# Altium PCB SquarePS.PcbDoc
Units mil, origin at the board's own origin, x right, y up, seen from the top; angles counter-clockwise.
Board outline 24000 x 20000 mil, 2 copper layers (Top Layer, Bottom Layer); 29 components, 11 nets, 87 pads, 67 vias.
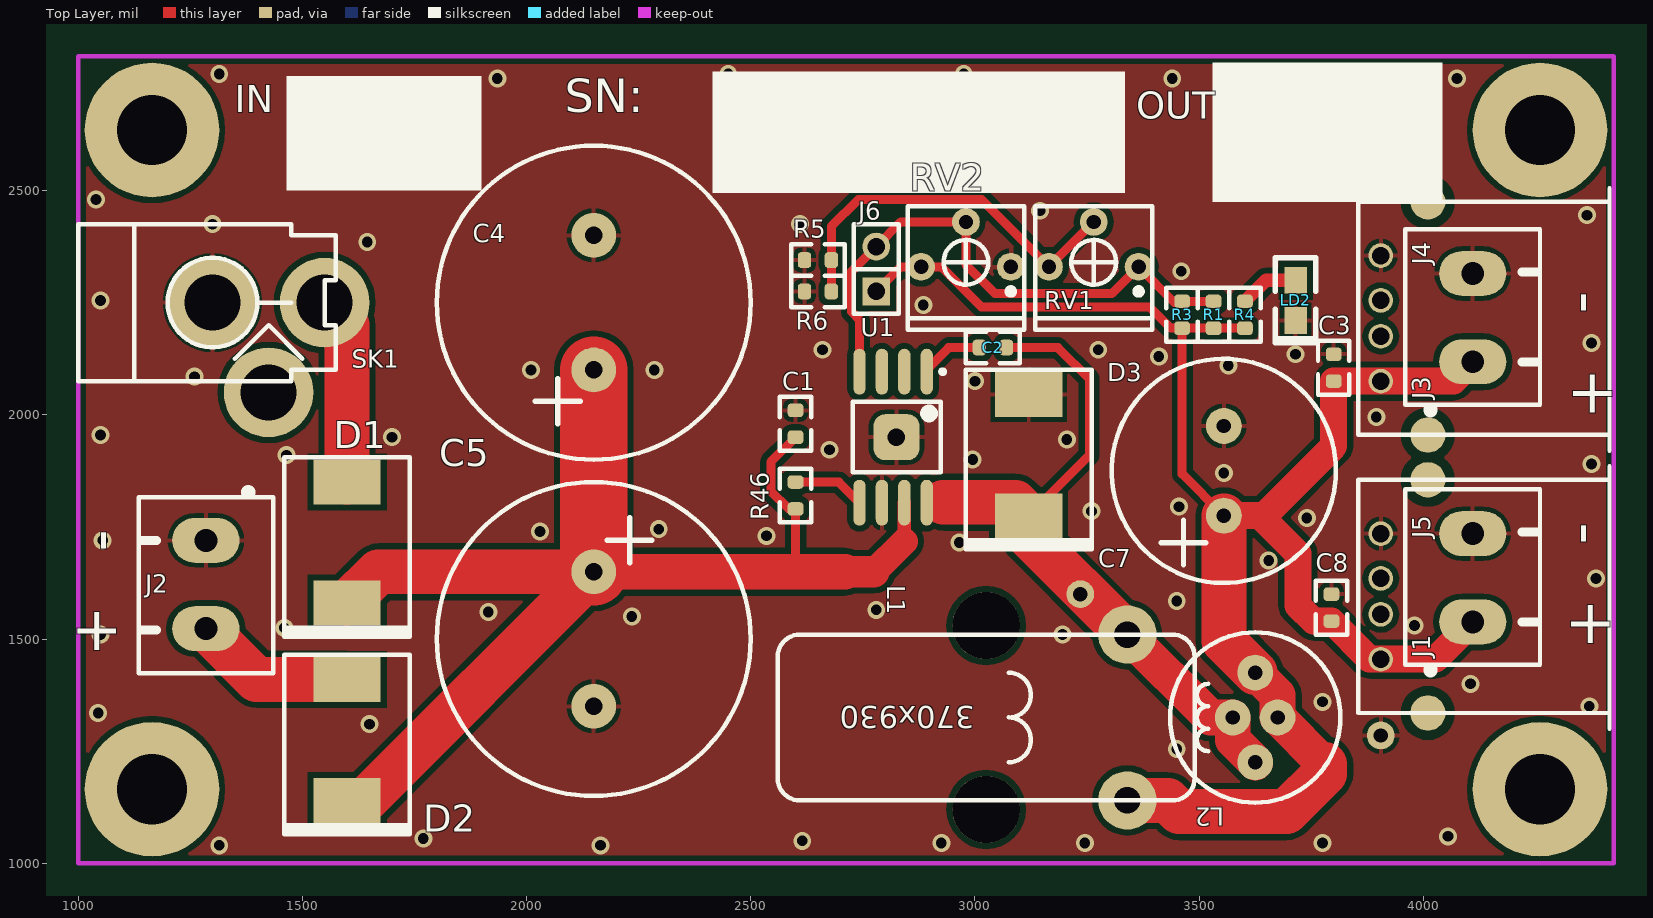
[diagram p0: Top Layer view]
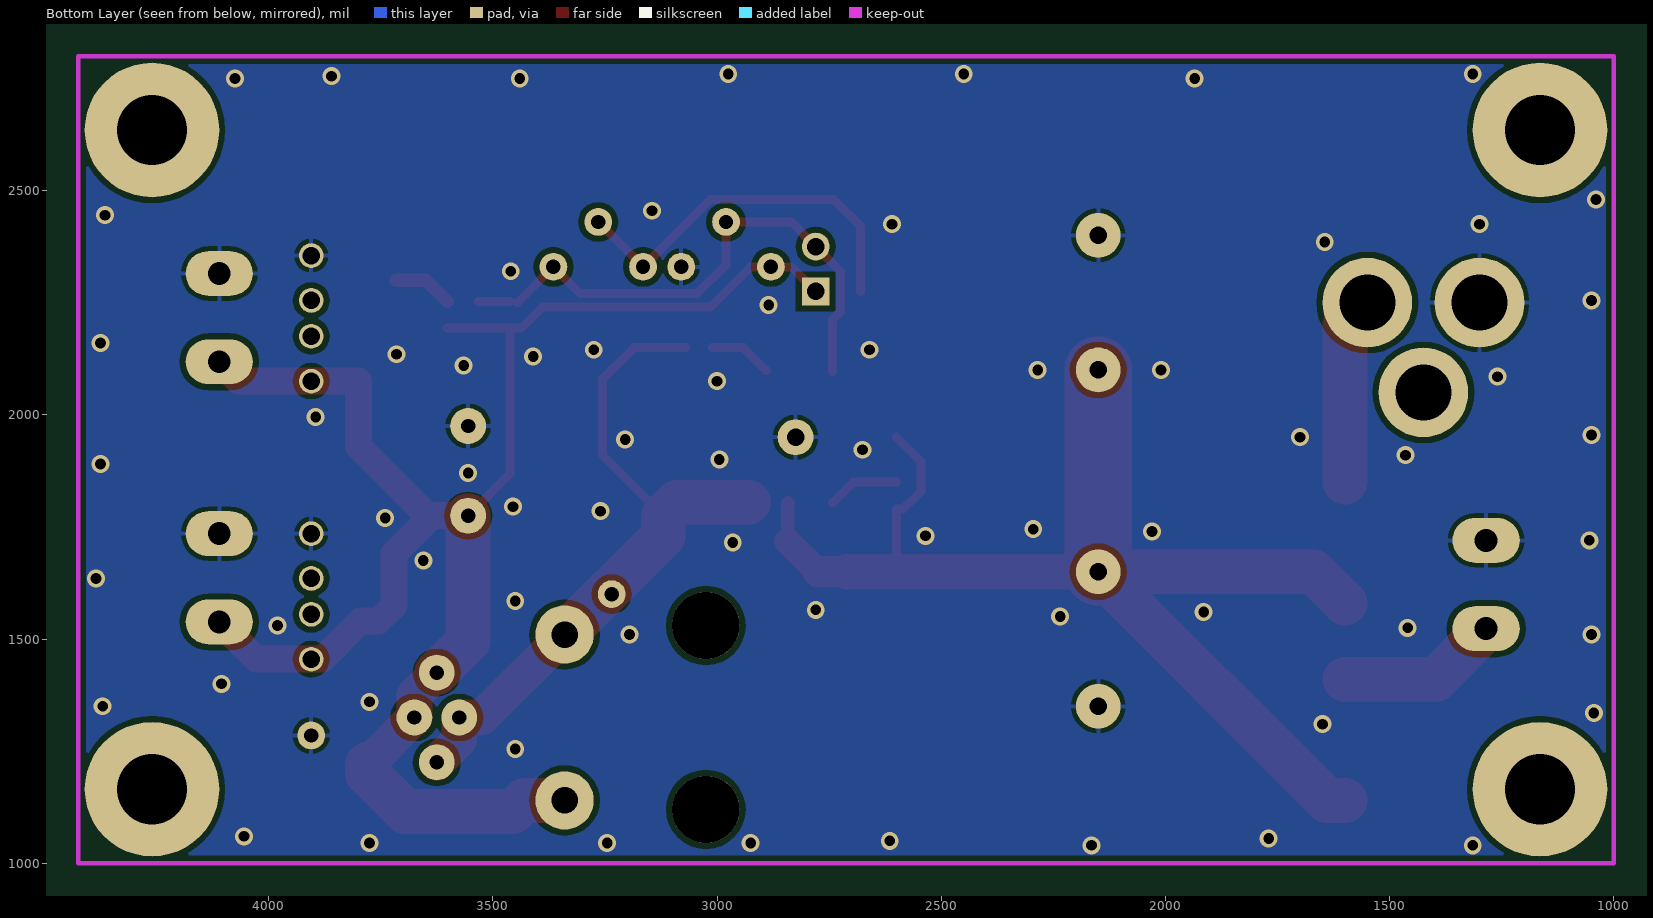
[diagram p1: Bottom Layer view, seen from below]

## Layer stack, top to bottom
Top Layer: signal copper 1.4
Dielectric: dielectric 12.6, FR-4, Dk 4.8
Bottom Layer: signal copper 1.4

## Board outline
0,0 24000,0 24000,20000 0,20000

## Design rules (kind name [scope] priority, off if disabled: settings)
Clearance Clearance_poly [InPoly] p1: gap=13
Clearance [All] p2: gap=7
ComponentClearance [All] p1 off: gap=10 collisioncheckmode=3 verticalgap=10 showdistances=FALSE
FabricationTestPointUsage TestPointUsage [All] p1: valid=0 allowmultiple=FALSE
FabricationTestpoint Testpoint [All] p1: side=3 testpointundercomponent=TRUE minsize=40 maxsize=100 preferedsize=60 minholesize=0 maxholesize=40 preferedholesize=32 testpointgrid=1 allowsidetop=TRUE allowsidebottom=TRUE usegrid=TRUE gridtolerance=0.01
HoleSize [All] p1: absolutevalues=TRUE maxlimit=150 minlimit=24 maxpercent=80.000 minpercent=20.000
MinimumAnnularRing [All] p1: minimumring=8
PlaneClearance [All] p1: clearance=12
PolygonConnect PolygonConnect_via [IsVia] p1: connectstyle=Direct reliefconductorwidth=10 reliefentries=4 polygonreliefangle="90 Angle" airgapwidth=10
PolygonConnect [All] p2: connectstyle=Relief reliefconductorwidth=10 reliefentries=4 polygonreliefangle="90 Angle" airgapwidth=10
RoutingVias [All] p1: holewidth=24 width=40 viastyle="Through Hole" minholewidth=24 minwidth=35 maxholewidth=28 maxwidth=50
SilkscreenOverComponentPads [All vs (IsText AND OnLayer('Top Overlay'))] p1: minsilkscreentomaskgap=10
SolderMaskExpansion [All] p1: expansion=4
Width [All] p1: maxlimit=150 minlimit=10 preferedwidth=10
22 further rules are at their usual default settings.

## Components (designator, comment, footprint, x,y, rotation, side; value= is the part's Value field where it differs from the comment)
C1 "100n" 0603 2600,2010 r270 top
C2 "10n" 0603 3010,2150 r0 top
C3 "100n" 0603 3800,2075 r90 top
C4 "1000uF 50V" RB.3/.7 2150,2100 r270 top
C5 "1000uF 50V" RB.3/.7 2150,1650 r90 top
C7 "2200u 25V" RB.2/.5 3555,1775 r270 top
C8 "100n" 0603 3795,1540 r90 top
D1 "SK56C" SMC 1600,1715 r90 top
D2 "SK56C" SMC 1600,1275 r90 top
D3 "SK56C" SMC 3120,1910 r90 top
J1 "CON2" Terms5mm2 4110,1538.15 r90 top
J2 "CON2" Terms5mm2 1285,1720 r270 top
J3 "CON2" Terms5mm2 4110,2118.15 r90 top
J4 "USB-A" USB_A 3905,2175 r90 top
J5 "USB-A" USB_A 3905,1555 r90 top
J6 "PINS2" SIP2 2780,2275 r90 top
L1 "47uH 5A" Inductor370x930 3075,1325 r180 top
L2 "22uH 1A" INDUCTOR6B 3625,1325 r180 top
LD2 "LED-S" 0805Diode 3715,2210 r90 top
R1 "DNF" 0603 3532,2253 r270 top
R3 "DNF" 0603 3462,2253 r270 top
R4 "1k" 0603 3602,2193 r90 top
R5 "DNF" 0603 2620,2345 r0 top
R6 "DNF" 0603 2620,2275 r0 top
R46 "470k" 0603 2600,1850 r270 top
RV1 "DNF" VR3362P 3265,2330 r0 top
RV2 "DNF" VR3362P 2980,2330 r0 top
SK1 "SOCKETDC" SKTPWR 1550,2250 r0 top
U1 "LM22674" PSOP-8 2825,1950 r270 top

## Footprints (in the part's own frame and the unit in brackets; to place one, negate y for a bottom-side part, rotate by r counter-clockwise, add the part's x,y. Pads: shape width x height; smd on the part's side, far side on the other; paste and mask are expansions set on the pad)
0603 [mil]
  rrect50% 30x35 smd: 1(0,0) 2(60,0)
  silkscreen extent -30,-35 90,35
0805Diode [mil]
  rect 60x50 smd: A(90,0) K(0,0)
  silkscreen extent -50,-45 140,45
INDUCTOR6B [mil] "380mil dia"
  round 80 hole 32: 1(0,100) 1(50,0) 2(-50,0) 2(0,-100)
  silkscreen extent -190,-190 190,190
Inductor370x930 [mil]
  round 150 hole 150: 0(50,205) 0(50,-205)
  round 130 hole 59: 1(-265,185) 2(-265,-185)
  silkscreen extent -415,-185 515,185
PSOP-8 [mm]
  oval 2.6x0.7 smd: 1(-3.711,1.717) 2(-3.711,0.447) 3(-3.711,-0.823) 4(-3.711,-2.093) 5(3.711,-2.093) 6(3.711,-0.823) 7(3.711,0.447) 8(3.711,1.717)
  rrect50% 2.6x2.6 smd: 9(0,0)
  silkscreen extent -3.84,-2.47 1.99,2.74
RB.2/.5 [mil]
  round 80 hole 32: 1(0,0) 2(-200,0)
  silkscreen extent -350,-250 150,250
RB.3/.7 [mil]
  round 100 hole 39: 1(0,0) 2(-300,0)
  silkscreen extent -500,-350 200,350
SIP2 [mil]
  rect 62x62 hole 39: 1(0,0)
  round 62 hole 39: 2(100,0)
  silkscreen extent -50,-50 150,50
SKTPWR [mil]
  round 200 hole 125: COM(-250,0) PIN(0,0) SW(-125,-200)
  silkscreen extent -550,-175 25,175
SMC [mil]
  rect 100x150 smd: A(135,0) K(-135,0)
  silkscreen extent -210,-140 190,140
Terms5mm2 [mil]
  oval 100x150 hole 51: 1(0,0) 2(196.85,0)
  silkscreen extent -108,-150 296,150
USB_A [mil]
  round 78.74 smd: 0(-220,-105) 0(300,-105)
  round 55 hole 39: 1(-100,0) 2(0,0) 3(80,0) 4(180,0)
  silkscreen extent -255,-510 330,50
VR3362P [mil]
  round 62 hole 32: CCW(-100,0) CW(100,0) W(0,100)
  silkscreen extent -130,-140 130,135

## Part data
C1 C2 C3 C8: library part CAP
C4 C5 C7: library part "CAPACITOR POL"
D1 D2 D3: library part "DIODE SCHOTTKY"
J6: library part CON2
L1 L2: library part INDUCTOR2
LD2: "LED"
R1 R3 R4 R5 R6 R46: library part RES8
RV1 RV2: library part RES6
SK1: "DC Power Connector"
U1: library part LM22675, "1A SMPS"

## Free pads (board coordinates)
  round 80 hole 39: 0(2825,1950)
  round 62 hole 32: 1(3235,1600) 2(3905,1285)
  round 300 hole 157 paste+0: ""(1165,1165) ""(1165,2635) ""(4260,1165) ""(4260,2635)

## Via types
v1: diameter 40, hole 24, Top Layer to Bottom Layer, tented both sides, 67 vias

## Nets (pads, with @x,y where several pads share a name; then routed paths per layer and width w, separated by ;. In a path a pad name is that pad's centre, name@x,y a point inside that pad or via, vN(x,y) a via of type N, cw(c..) or ccw(c..) an arc to the next point about the centre after c; other vN are vias at no path point)
GND: C1.1 C3.2 C4.2 C5.2 C7.2 C8.2 D3.A J1.2 J2.1 J3.2 J4.4 J5.4 LD2.K pad.0 pad.2 R5.1 R6.1 RV2.CW SK1.COM U1.6 U1.9
  other v1: 1315,1040 2165,1040 2925,1045 3245,1045 3775,1045 2615,1050 1770,1055 4055,1060 3450,1255 1650,1310 1045,1335 4370,1350 3775,1360 4105,1400 1050,1510 3195,1510 1460,1525 3980,1530 2235,1550 1915,1560 2780,1565 3450,1585 4385,1635 3655,1675 2965,1715 1055,1720 2535,1730 2030,1740 2295,1745 3740,1770 3260,1785 3455,1795 3555,1870 4375,1890 2995,1900 1465,1910 2676,1922 3205,1945 1700,1950 1050,1955 3895,1995 3000,2075 1260,2085 2010,2100 2285,2100 3565,2110 3410,2130 3715,2135 2660,2145 3275,2145 4375,2160 2885,2245 1050,2255 3460,2320 1645,2385 1300,2425 2610,2425 4365,2445 3145,2455 1040,2480 1935,2750 3440,2750 4075,2750 3860,2755 1315,2760 2450,2760 2975,2760
NetC1_2: C1.2 C4.1 C5.1 D1.K D2.K R46.2 U1.7 | length 2951.5
  Top Layer w20: 2600,1650 R46.2 2585,1790 2545,1830 2545,1895 C1.2
  Top Layer w30: 2842.59,1717.59 U1.7
  Top Layer w60: 2775,1650 2842.59,1717.59
  Top Layer w70: 2710,1650 2775,1650
  Top Layer w80: C5.1 2600,1650 2710,1650
  Top Layer w100: D2.K 1640,1140 C5.1 1670,1650 D1.K
  Top Layer w150: C5.1 C4.1
NetC2_1: C2.1 U1.1 | length 141.3
  Top Layer w20: U1.1@2890,2098.69 2941.31,2150 C2.1
NetC2_2: C2.2 D3.K L1.2 L2.1 pad.1 U1.8 | length 1565.8
  Top Layer w20: C2.2 3185,2150 3255,2080 3255,1910 D3.K
  Top Layer w80: L1.2 3525,1325 3575,1325 3575,1275 L2.1@3625,1225
  Top Layer w100: 2930,1805 3090,1805 D3.K 3120,1730 L1.2
NetD1_A: D1.A SK1.PIN | length 420.7
  Top Layer w100: SK1.PIN 1600,2200 D1.A
NetD2_A: D2.A J2.2 | length 361.9
  Top Layer w100: J2.2 1398.15,1410 D2.A
NetJ6_2: J6.2 R1.1 R3.1 RV1.CW RV2.W U1.4 | length 1246.7
  Top Layer w20: U1.4 2742.59,2212.41 2725,2230 2725,2320 J6.2 2835,2430 RV2.W 2980,2335 3045,2270 3305,2270 RV1.CW R3.1@3445,2250 ; R3.1 R1.1
NetLD2_A: LD2.A R4.2 | length 132.5
  Top Layer w30: R4.2 3649,2300 LD2.A
NetR5_2: R5.2 R6.2 RV1.CCW RV1.W | length 858.4
  Top Layer w20: R6.2 R5.2 2680,2420 2740,2480 3015,2480 RV1.CCW RV1.W
NetR46_1: R46.1 U1.5 | length 161.7
  Top Layer w20: R46.1 2696.48,1850 U1.5
VCC: C3.1 C7.1 C8.1 J1.1 J3.1 J4.1 J5.1 J6.1 L1.1 L2.2 R1.2 R3.2 R4.1 RV2.CCW | length 4073
  Top Layer w20: J6.1 2835,2330 RV2.CCW 2925,2330 3015,2240 3390,2240 3437,2193 R3.2 ; C7.1 3462,1868 R3.2 ; R4.1 R1.2 ; R3.2 R1.2 ; R3.2 R1.2
  Top Layer w60: C7.1 3635.61,1775 ; J1.1 4026.85,1455 J5.1 3880,1455 C8.1 3755,1540 3720,1575 3720,1690.61 3635.61,1775 ; J3.1 4066.85,2075 J4.1 C3.1 3800,1930 3645,1775 3635.61,1775
  Top Layer w80: L2.2@3625,1425 3675,1375 3675,1325 3780,1220
  Top Layer w100: L1.1 3430,1140 3455,1115 3695,1115 3780,1200 3780,1220 ; C7.1 3555,1495 L2.2@3625,1425
pads on no net: J4.0 J4.2 J4.3 J5.0 J5.2 J5.3 L1.0 SK1.SW U1.2 U1.3

## Polygon pours and split planes (outlines as drawn)
GND on Top Layer "GND" (solid, remove dead copper, pour order 4): 1000,1000 4425,1000 4425,2800 1000,2800
GND on Bottom Layer "GND" (solid, remove dead copper, pour order 6): 1000,2800 4425,2800 4425,1000 1000,1000

## Keep-outs
Keep-Out Layer:
  lines w10: 1000,1000 4425,1000 4425,2800 1000,2800 1000,1700 1000,1625 1000,1000

## Silkscreen, mask and mechanical layers (free items; w line width, h text height)
Top Overlay:
  rectangle: 3530,2475 4043.05,2785
  rectangle: 1465,2500 1900,2755
  rectangle: 2415,2495 3335,2765
  text "IN" at 1350,2675 h60
  text "SN:" at 2085,2675 h75
  text "OUT" at 3360,2660 h60
  text "-" at 4395,2225 h100 r90
  text "+" at 4320,2005 h100
  text "-" at 4395,1710 h100 r90
  text "-" at 1020,1695 h100 r270
  text "+" at 4315,1490 h100
  text "+" at 1100,1475 h100
Mechanical 1:
  lines w10: 1000,1000 4425,1000 4425,2800 1000,2800 1000,1000
Mechanical 15:
  lines w10: 1165,1165 4260,1165 4260,2635 1165,2635 1165,1165

## Dimensions
1000,2800 to 1000,1000 on Mechanical 3
1000,1000 to 4425,1000 on Mechanical 3

## Text inside footprints (layer, text, board x,y; h text height)
L1: Top Overlay "370x930" at 3000,1350 h50 r180